# Altium PCB FiberOptic.PcbDoc
Units mm, origin at the board's own origin, x right, y up, seen from the top; angles counter-clockwise.
Board outline 47.62 x 31.75 mm, 2 copper layers (Top Layer, Bottom Layer); 45 components, 24 nets, 155 pads, 31 vias.
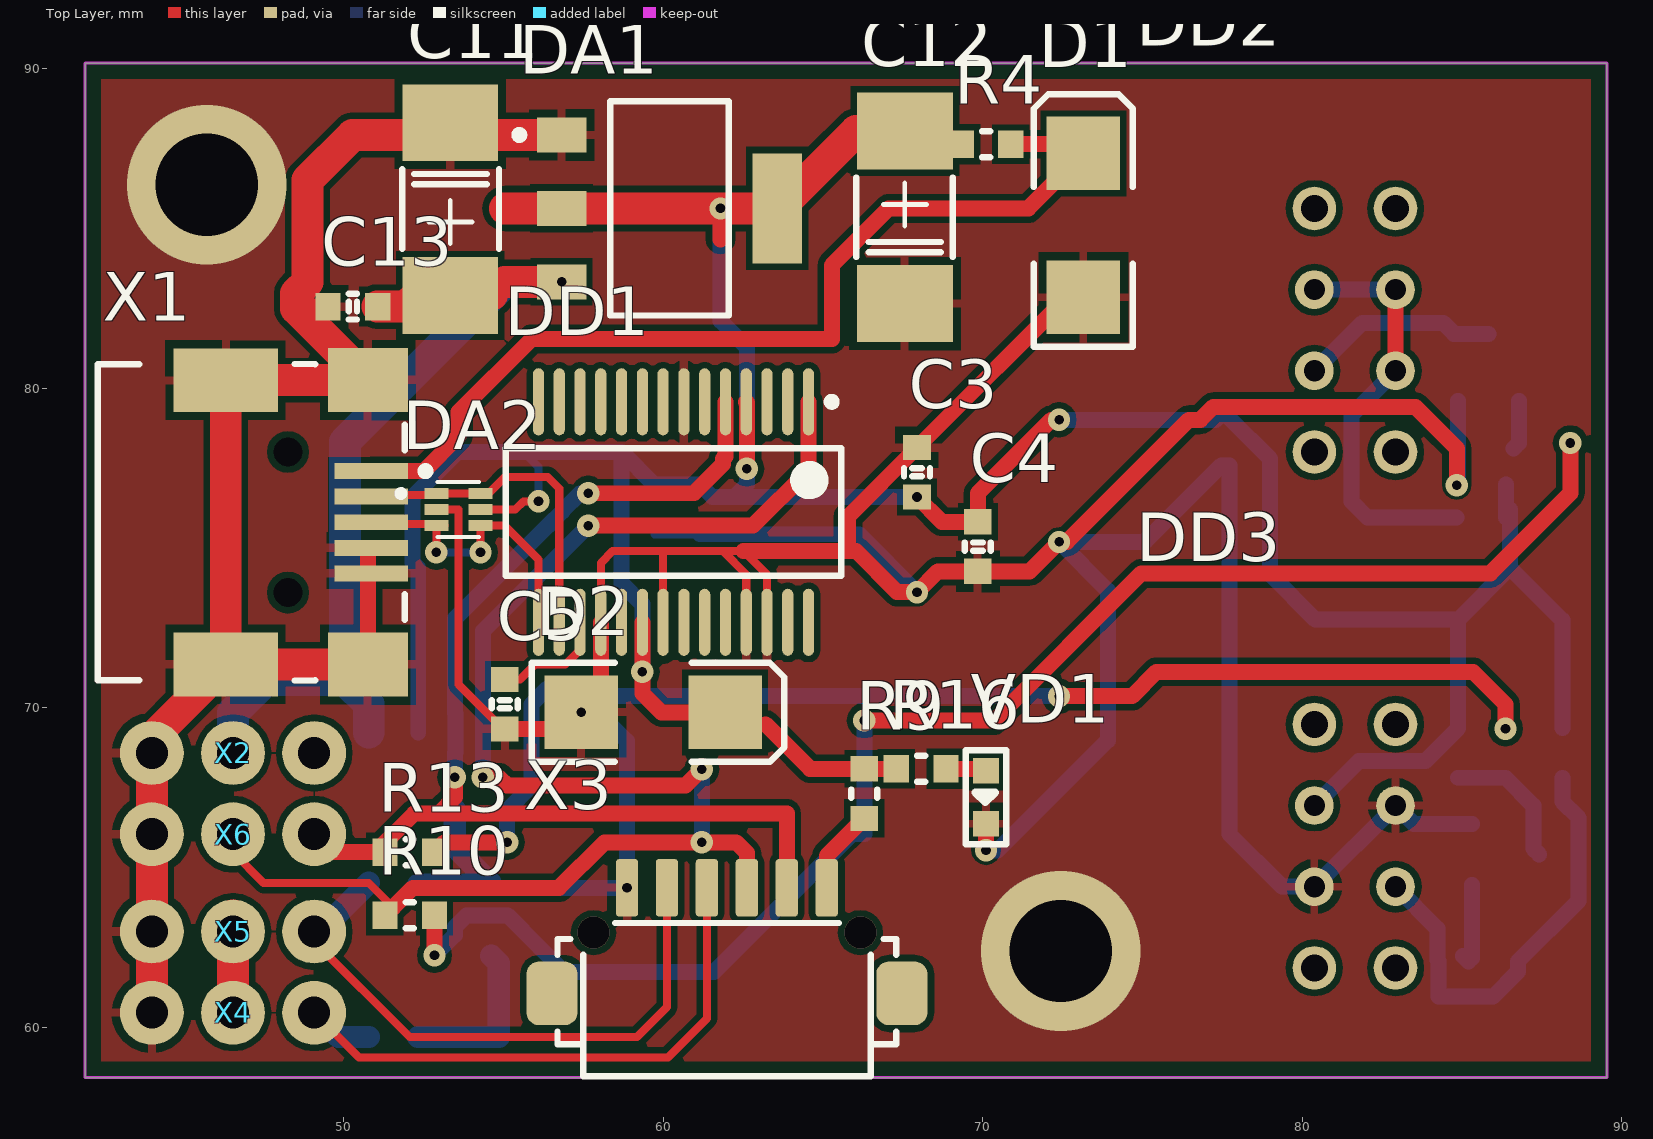
[diagram p0: Top Layer view]
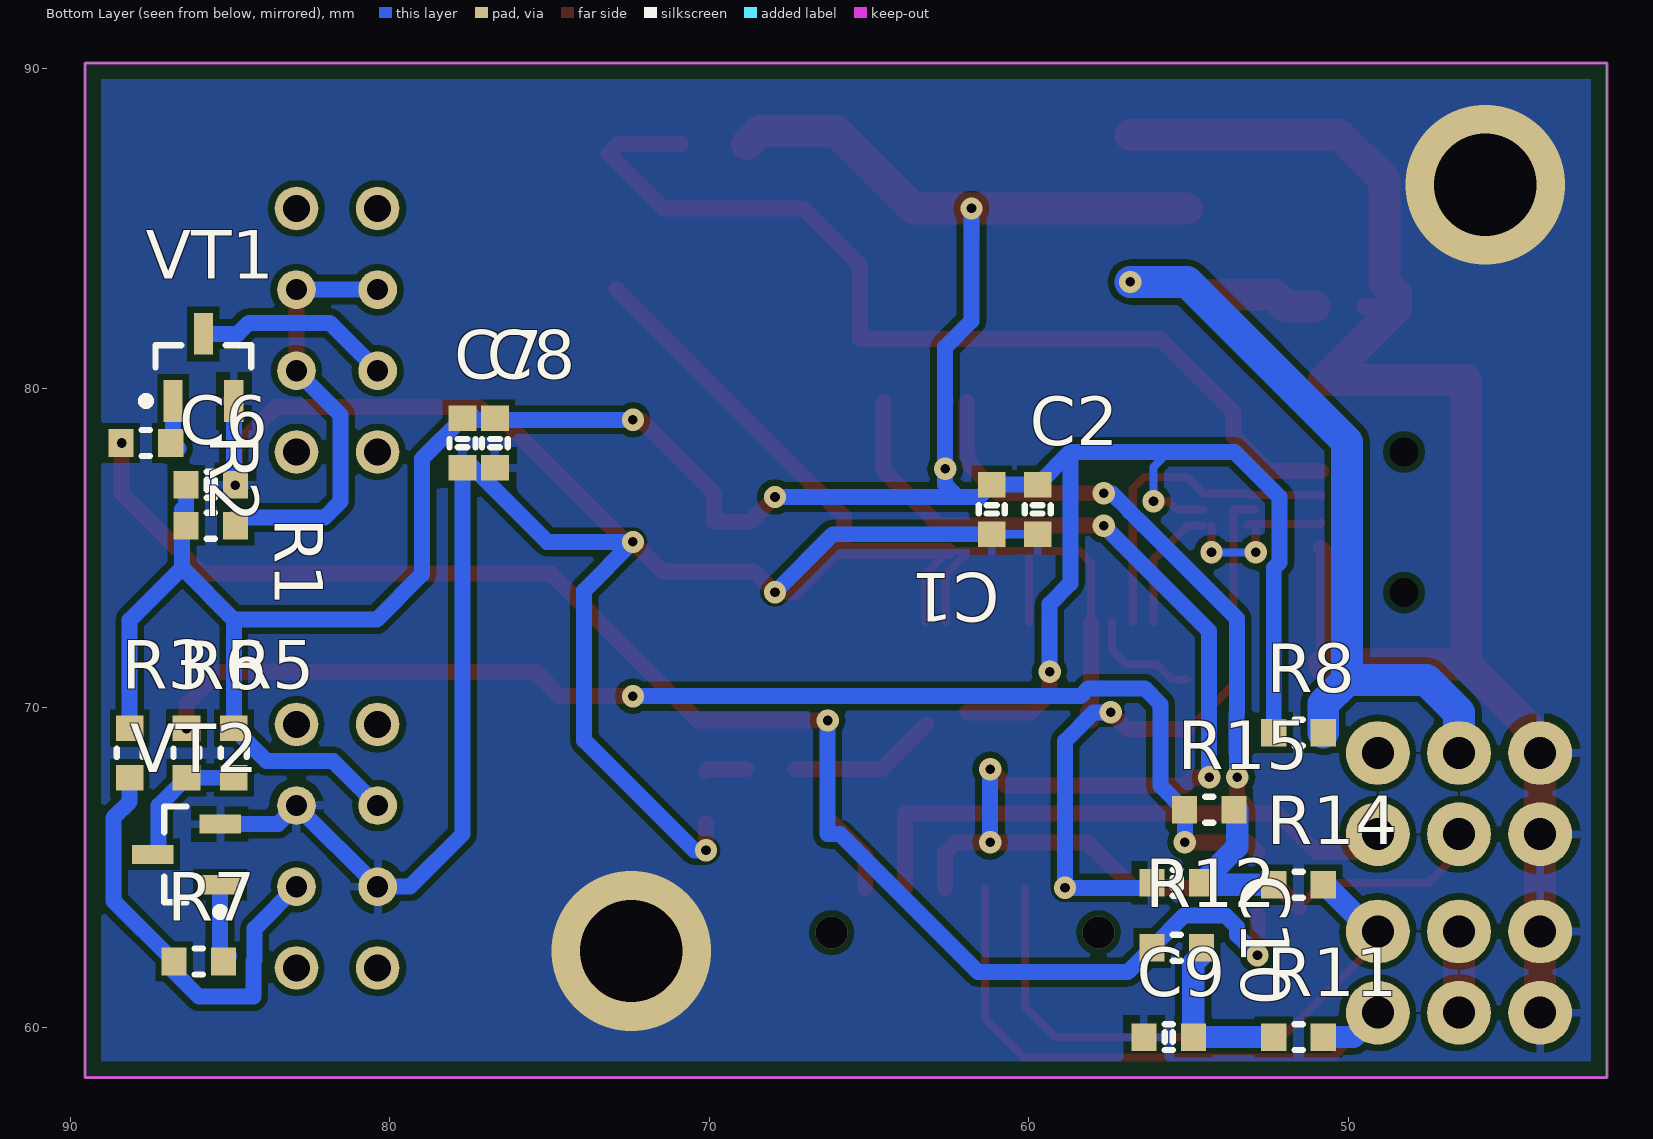
[diagram p1: Bottom Layer view, seen from below]
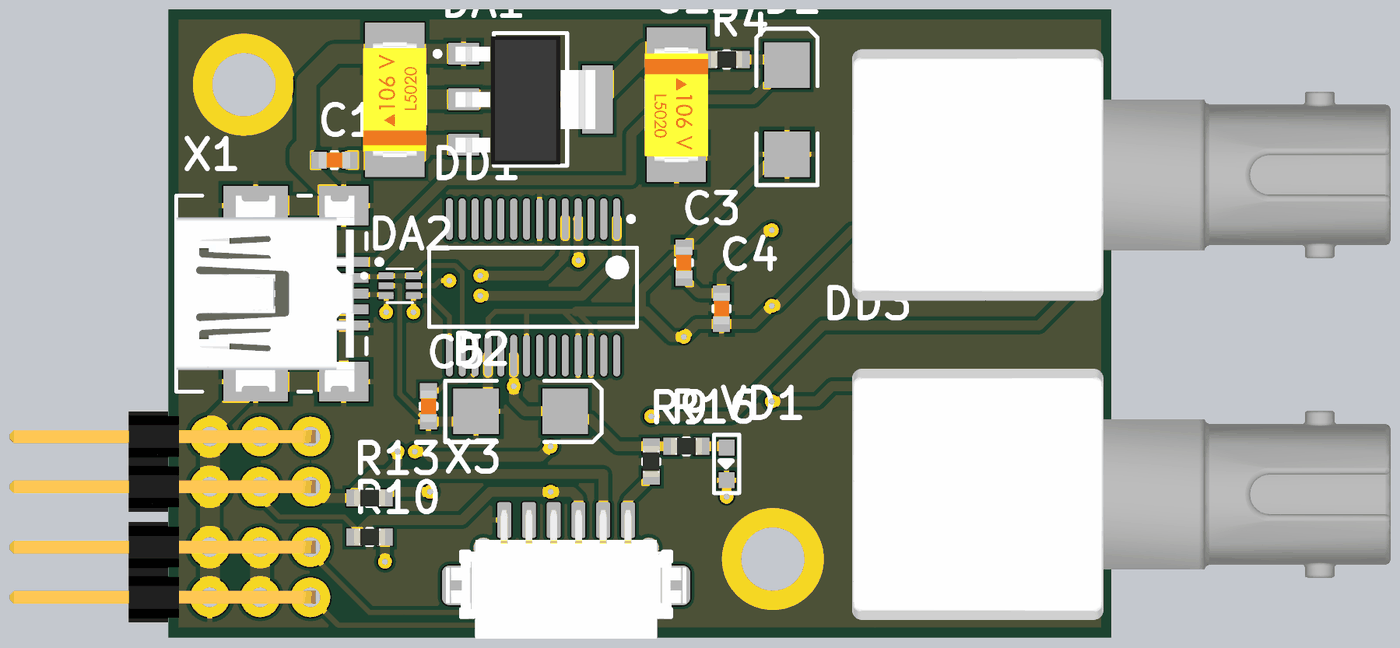
[diagram p2: 3D render of the assembled board from above, using the file's embedded part models]
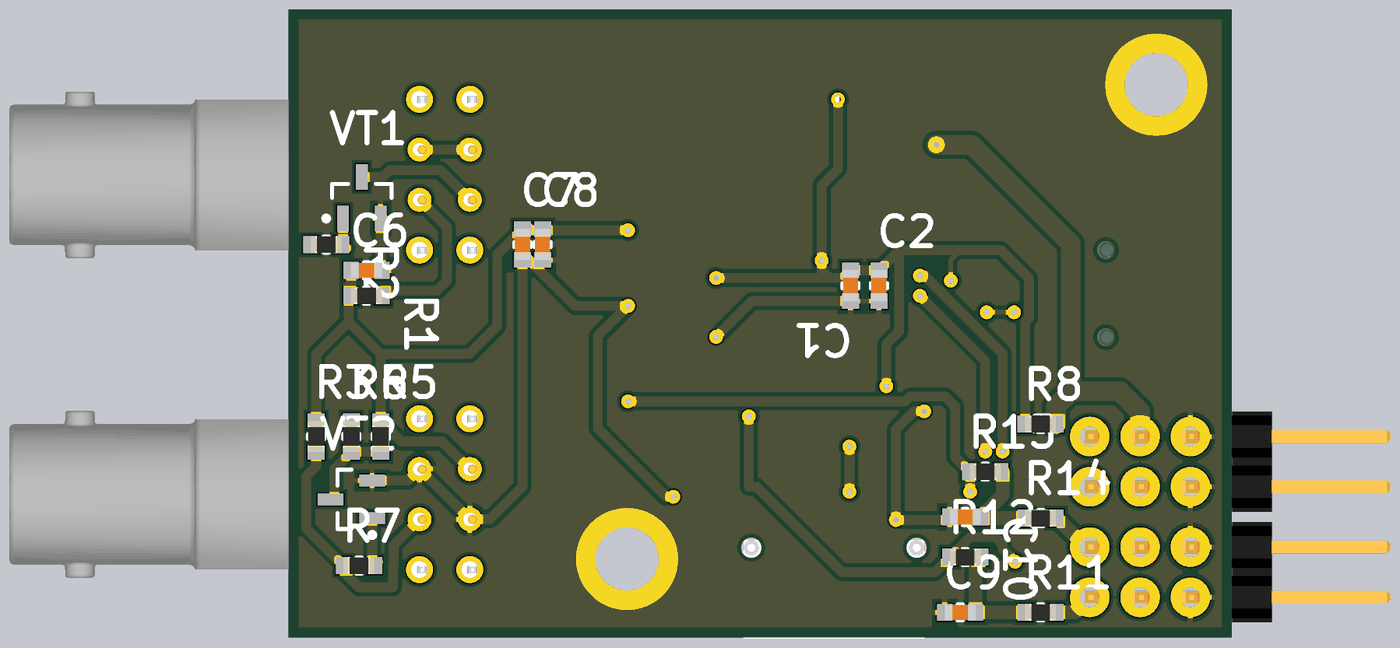
[diagram p3: 3D render of the assembled board from below, using the file's embedded part models]

## Layer stack, top to bottom
Top Solder: solder mask 0.0102, Solder Resist, Dk 3.5
Top Layer: signal copper 0.0356
Dielectric 1: dielectric 0.32, FR-4, Dk 4.8
Bottom Layer: signal copper 0.0356
Bottom Solder: solder mask 0.0102, Solder Resist, Dk 3.5

## Board outline
41.91,58.42 89.535,58.42 89.535,90.17 41.91,90.17

## Design rules (kind name [scope] priority, off if disabled: settings)
BoardOutlineClearance [All] p1: gap=0.5 ignorepadtopadclearanceinfootprint=FALSE except(0: Arc-SplitBarrior Arc-SplitContinuation Track-SplitBarrior Track-SplitContinuation SMDPad-SplitContinuation THPad-SplitContinuation Via-SplitBarrior Via-SplitContinuation Fill-SplitBarrior Fill-SplitContinuation Poly-SplitBarrior Poly-SplitContinuation Region-SplitBarrior Region-SplitContinuation Text-SplitBarrior Text-SplitContinuation)
Clearance [All] p1: gap=0.15 ignorepadtopadclearanceinfootprint=FALSE except(0.2: Arc-Fill Arc-Poly Arc-Region Track-Fill Track-Poly Track-Region SMDPad-Fill SMDPad-Poly SMDPad-Region THPad-Fill THPad-Poly THPad-Region Via-Fill Via-Poly Via-Region Fill-Fill Fill-Poly Fill-Region Poly-Poly Poly-Region Region-Region)
ComponentClearance [All] p1: gap=-0.05 collisioncheckmode=3 verticalgap=0 showdistances=TRUE
DiffPairsRouting [All] p1: maxlimit=0.15 minlimit=0.15 mostfreqgap=0.15 toplayer_minwidth=0.15 toplayer_maxwidth=0.15 toplayer_prefwidth=0.15 bottomlayer_minwidth=0.15 bottomlayer_maxwidth=0.15 bottomlayer_prefwidth=0.15 maxuncoupledlength=5
Height [All] p1: minheight=0 maxheight=50 prefheight=10
HoleSize [All] p1: absolutevalues=TRUE maxlimit=5 minlimit=0.3 maxpercent=80.000 minpercent=20.000
HoleToHoleClearance [All] p1: gap=0.4 allowstackedmicrovias=TRUE
MinimumAnnularRing [All] p1: minimumring=0.2
MinimumSolderMaskSliver [All] p1: minsoldermaskwidth=0.15
PlaneClearance [All] p1: clearance=0.254
PolygonConnect [All] p1: thpad.connectstyle=Relief thpad.reliefconductorwidth=0.254 thpad.reliefentries=4 thpad.polygonreliefangle="90 Angle" thpad.airgapwidth=0.254 smdpad.connectstyle=Relief smdpad.reliefconductorwidth=0.254 smdpad.reliefentries=4 smdpad.polygonreliefangle="90 Angle" smdpad.airgapwidth=0.254 via.connectstyle=Direct via.reliefconductorwidth=0.15 via.reliefentries=4 via.polygonreliefangle="90 Angle" via.airgapwidth=0.2
RoutingVias [All] p1: holewidth=0.3 width=0.7 viastyle="Through Hole" minholewidth=0.3 minwidth=0.7 maxholewidth=2 maxwidth=3
SilkToSilkClearance [All] p1: silktosilkclearance=0.15
SilkToSolderMaskClearance SilkscreenOverComponentPads [IsPad] p1: minsilkscreentomaskgap=0.1 clearancetoexposedcopper=TRUE
SolderMaskExpansion [All] p1: expansion=0.075
Width [All] p1: maxlimit=5 minlimit=0.254 preferedwidth=0.5
21 further rules are at their usual default settings.

## Components (designator, comment, footprint, x,y, rotation, side; value= is the part's Value field where it differs from the comment)
C1 "100n" SMT0603CAP/VISHAY 61.16,76.2 r270 bottom
C2 "100n" SMT0603CAP/VISHAY 59.725,76.2 r270 bottom
C3 "100n" SMT0603CAP/VISHAY 67.945,77.365 r90 top
C4 "100n" SMT0603CAP/VISHAY 69.85,75.04 r270 top
C5 "100n" SMT0603CAP/VISHAY 55.045,70.104 r270 top
C6 "1u" SMT0603CAP/VISHAY 85.598,76.975 r180 bottom
C7 "100n" SMT0603CAP/VISHAY 77.724,78.28 r270 bottom
C8 "100n" SMT0603CAP/VISHAY 76.708,78.28 r270 bottom
C9 "10n" SMT0603CAP/VISHAY 55.626,59.69 r0 bottom
C10 "10n" SMT0603CAP/VISHAY 55.372,64.516 r0 bottom
C11 "100u" VISHAY-TANTALUM-CAP-TYPE-C/VISHAY 53.34,85.598 r90 top
C12 "100u" VISHAY-TANTALUM-CAP-TYPE-C/VISHAY 67.564,85.344 r270 top
C13 "100n" SMT0603CAP/VISHAY 50.292,82.55 r0 top
D1 "5.0v" SMB 73.152,85.09 r90 top
D2 "5.0v" SMB 59.69,69.85 r0 top
DA1 "REG1117-5" ZZ311 60.198,85.62 r270 top
DA2 "USBLC6-2P6" SOT50P160X60-6N 53.594,76.2 r0 top
DD1 "FT232RL-Reel" SSOP-28_N 60.325,76.12 r270 top
DD2 "HFBR-1414Z" HFBR1414Z 90.17,82.185 r0 top
DD3 "HFBR-2412Z" HFBR2412Z 90.17,66.04 r0 top
R1 "100" SMT0603/VISHAY 85.598,75.692 r0 bottom
R2 "100" SMT0603/VISHAY 87.63,78.28 r0 bottom
R3 "560" SMT0603/VISHAY 88.138,68.58 r90 bottom
R4 "1" SMT0603/VISHAY 70.104,87.63 r180 top
R5 "4.7k" SMT0603/VISHAY 84.88,68.58 r270 bottom
R6 "100" SMT0603/VISHAY 86.36,68.58 r270 bottom
R7 "100" SMT0603/VISHAY 85.974,62.055 r0 bottom
R8 "0 or empty" SMT0603/VISHAY 51.562,69.215 r180 bottom
R9 "0 or empty" SMT0603/VISHAY 66.294,67.31 r90 top
R10 "0 or empty" SMT0603/VISHAY 52.07,63.5 r180 top
R11 "330" SMT0603/VISHAY 51.562,59.69 r0 bottom
R12 "0 or empty" SMT0603/VISHAY 55.372,62.484 r0 bottom
R13 "0 or empty" SMT0603/VISHAY 52.07,65.474 r180 top
R14 "330" SMT0603/VISHAY 51.562,64.455 r0 bottom
R15 "0 or empty" SMT0603/VISHAY 54.356,66.802 r0 bottom
R16 "1k" SMT0603/VISHAY 68.072,68.085 r180 top
VD1 "KP-1608SRC-PRV/KINGBRIGHT" 1.6x0.8SMTLED/KINGBRIGHT 70.104,67.196 r270 top
VT1 "IRML6244tr2pbf" SOT23_N 85.83,80.645 r90 bottom
VT2 "IRML6244tr2pbf" SOT23_N 86.36,65.405 r0 bottom
X1 "miniUSB_X" miniUSB_AB 43.01,75.8 r180 top
X2 "PLT-3" PLT-3T 49.08,68.58 r180 top
X3 "DF13" "HIROSE DF13-6P-1.25H" 61.995,60.96 r180 top
X4 "PLT-3" PLT-3T 49.08,60.452 r180 top
X5 "PLT-3" PLT-3T 49.08,62.992 r180 top
X6 "PLT-3" PLT-3T 49.08,66.04 r180 top

## Footprints (in the part's own frame and the unit in brackets; to place one, negate y for a bottom-side part, rotate by r counter-clockwise, add the part's x,y. Pads: shape width x height; smd on the part's side, far side on the other; paste and mask are expansions set on the pad)
1.6x0.8SMTLED/KINGBRIGHT [mm]
  rect 0.8x0.8 smd: 1(-0.825,0) 2(0.825,0)
  silkscreen extent -1.47,-0.64 1.47,0.64, body extent -0.8,-0.4 0.8,0.4, height 0.7
HFBR1414Z [mm]
  round 1.365 / inner round 1.524 / far side round 1.365 hole 0.84: 1(-9.79,3.435) 4(-9.79,-4.185) 5(-7.25,-4.185) 8(-7.25,3.435)
  round 1.21 / inner round 1.524 / far side round 1.21 hole 0.66: 2(-9.79,0.895) 3(-9.79,-1.645) 6(-7.25,-1.645) 7(-7.25,0.895)
  body extent -15.62,-6.73 13.47,7.49, height 10.2
HFBR2412Z [mm]
  round 1.365 / inner round 1.524 / far side round 1.365 hole 0.84: 1(-9.79,3.435) 4(-9.79,-4.185) 5(-7.25,-4.185) 8(-7.25,3.435)
  round 1.21 / inner round 1.524 / far side round 1.21 hole 0.66: 2(-9.79,0.895) 3(-9.79,-1.645) 6(-7.25,-1.645) 7(-7.25,0.895)
  body extent -15.62,-6.73 13.47,5.96, height 10.2
"HIROSE DF13-6P-1.25H" [mm] "DF13 Series 1.25mm pitch miniature crimping connector single row"
  rrect30% 0.7x1.8 smd: 1(-3.125,-3.4) 2(-1.875,-3.4) 3(-0.625,-3.4) 4(0.625,-3.4) 5(1.875,-3.4) 6(3.125,-3.4)
  rrect50% 1.6x2 smd: M(-5.475,-0.1) M(5.475,-0.1)
  silkscreen extent -5.3,-2.3 5.3,2.5, body extent -6.07,-3.9 6.08,2.6, height 3.59
miniUSB_AB [mm] "Connector; USB2.0, Type AB, SM; 5 Position; Right Angle"
  rect 2.3x0.5 smd: 1(-7.85,-1.6) 2(-7.85,-0.8) 3(-7.85,0) 4(-7.85,0.8) 5(-7.85,1.6)
  rect 2.5x2 smd: 6(-7.75,4.45) 8(-7.75,-4.45)
  rect 3.262x2 smd: 7(-3.302,4.445) 9(-3.302,-4.445)
  round 0.6 hole 0.9 unplated: MH1(-5.25,2.2) MH2(-5.25,-2.2)
  silkscreen extent -9.68,-4.95 0.7,4.95, body extent -8.29,-4.95 0.71,4.95, height 4
PLT-3T [mm]
  round 2 hole 1: 1(0,0) 2(2.54,0) 3(5.08,0)
  body extent -0.25,-1.27 15.19,1.27, height 7.62
SMB [mm] "DO-214-AA/SMB; 2 C-Bend Leads; Body 5.3 x 3.6 mm, inc. leads (LxW)"
  rect 2.3x2.3 smd: 1(-2.25,0) 2(2.25,0)
  silkscreen extent -3.8,-1.55 4.1,1.55
SMT0603/VISHAY [mm]
  rect 0.787x0.864 smd: 1(-0.775,0) 2(0.775,0)
  silkscreen extent -0.13,-0.41 0.13,0.41, body extent -0.78,-0.43 0.77,0.43, height 0.45
SMT0603CAP/VISHAY [mm]
  rect 0.787x0.864 smd: 1(-0.775,0) 2(0.775,0)
  silkscreen extent -0.13,-0.41 0.13,0.41, body extent -0.8,-0.4 0.8,0.4, height 0.5
SOT23_N [mm] "SOT23, 3-Leads, Body 2.9x1.3mm, Pitch 0.95mm, Lead Span 2.3mm, IPC Medium Density"
  rect 1.3x0.6 smd: 1(-1.05,0.95) 2(-1.05,-0.95) 3(1.05,0)
  silkscreen extent -1.17,-1.5 0.7,1.93, body extent -0.7,-1.5 0.7,1.5, height 1.1
SOT50P160X60-6N [mm]
  rect 0.75x0.35 smd: 1(-0.69,0.5) 2(-0.69,0) 3(-0.69,-0.5) 4(0.69,-0.5) 5(0.69,0) 6(0.69,0.5)
  silkscreen extent -1.9,-0.85 0.65,0.85
SSOP-28_N [mm] "SOP, 28-Leads, Body 10.2x5.3mm, Pitch 0.65mm, IPC Medium Density"
  oval 2.1x0.35 smd: 1(-3.45,4.225) 2(-3.45,3.575) 3(-3.45,2.925) 4(-3.45,2.275) 5(-3.45,1.625) 6(-3.45,0.975) 7(-3.45,0.325) 8(-3.45,-0.325) 9(-3.45,-0.975) 10(-3.45,-1.625) 11(-3.45,-2.275) 12(-3.45,-2.925) 13(-3.45,-3.575) 14(-3.45,-4.225) 15(3.45,-4.225) 16(3.45,-3.575) 17(3.45,-2.925) 18(3.45,-2.275) 19(3.45,-1.625) 20(3.45,-0.975) 21(3.45,-0.325) 22(3.45,0.325) 23(3.45,0.975) 24(3.45,1.625) 25(3.45,2.275) 26(3.45,2.925) 27(3.45,3.575) 28(3.45,4.225)
  silkscreen extent -3.57,-5.25 2,5.25, body extent -2.8,-5.25 2.8,5.25, height 2
VISHAY-TANTALUM-CAP-TYPE-C/VISHAY [mm]
  rect 2.4x3 smd: 1(-2.7,0) 2(2.7,0)
  silkscreen extent -1.24,-1.52 1.24,1.5, body extent -2.9,-1.6 2.9,1.6, height 2.6
ZZ311 [mm] "SOT-223/SC-73; 4 Leads; Body 6.7 x 7.3 mm, inc. leads (LxW max)"
  rect 1.1x1.55 smd: 1(-2.3,-3.375) 2(0,-3.375) 3(2.3,-3.375)
  rect 3.45x1.55 smd: 4(0,3.375)
  silkscreen extent -3.35,-4.82 3.35,1.85, body extent -3.2,-3.79 3.3,3.28, height 1.6

## Part data
C1 C2 C3 C4 C5 C6 C7 C8 C9 C10 C13: library part CC0603JRNPO9BN181/YAGEO, "180p 50V 0603 cap", PackageReference=0603
C11 C12: library part 293D107X9010C2TE3/VISHAY_1, "100u 10V tantalum cap"
D1 D2: library part Diode, "Default Diode", Code_JEDEC=DO-214-AB, LatestRevisionDate=17-Jul-2002, LatestRevisionNote="Re-released for DXP Platform.", PackageDescription="DO-214-AB/SMC; 2 C-Bend Leads; Body 7.9 x 5.9 mm, inc. leads (LxW)", PackageReference=SMC, PackageVersion=Sep-1996, Published=8-Jun-2000, Publisher="Altium Limited"
DA1: "800mA and 1A Low Dropout Positive Regulator 2.85V, 3.3V, 5V, and Adjustable", ComponentLink1Description="Manufacturer Link", ComponentLink1URL=http://www.ti.com/, ComponentLink2Description=Datasheet, ComponentLink2URL=http://www-s.ti.com/sc/ds/REG1117.pdf, DatasheetVersion=Sep-1997, LatestRevisionDate=17-Jul-2002, LatestRevisionNote="Re-released for DXP Platform.", PackageDescription="SOT-223/SC-73; 4 Leads; Body 6.7 x 7.3 mm, inc. leads (LxW max)", PackageReference=ZZ311, PackageVersion=revC, Published=8-Jun-2000, Publisher="Altium Limited"
DA2: "USBLC6 Series 2 Line 6 V SMT Bi Directional ESD Protection - SOT-666", PACKAGE="SOT-563 STMicroelectronics", Availability=Unavailable, MF=STMicroelectronics, MP=USBLC6-2P6, Price=None, SnapEDA_Link=https://www.snapeda.com/parts/USBLC6-2P6/STMicroelectronics/view-part/?ref=snap
DD1: "USB UART Asynchronous Serial Data Transfer Chip, 28-pin SSOP, Tape and Reel", Manufacturer=FTDI, ComponentLink1Description="Manufacturer URL", ComponentLink1URL=http://www.ftdichip.com/, ComponentLink2Description=Datasheet, ComponentLink2URL=http://www.ftdichip.com/Support/Documents/DataSheets/ICs/DS_FT232R.pdf, DatasheetVersion="ver 2.10, Mar-2012", PackageDescription="28-Pin Small Outline Package 0.65 mm Pitch", PackageReference=SSOP-28, PackageVersion=Mar-12, PartNumber=FT232RL-Reel
DD2: Manufacturer_Name="Avago Technologies", PACKAGE=HFBR2416Z, Arrow_Part_Number=HFBR-1414Z, Arrow_Price-Stock=http://uk.rs-online.com/web/p/products/4965692, DeviceSetName=HFBR-1414Z, GateName_1=G$1, Height=mm, LibraryName=HFBR-1414Z, Manufacturer_Part_Number=HFBR-1414Z, RS_Part_Number=4965692, RS_Price-Stock=http://uk.rs-online.com/web/p/products/4965692, SymbolName_1=HFBR-1414Z
DD3: Manufacturer_Name="Avago Technologies", Manufacturer_Part_Number=HFBR-1414Z, PACKAGE=HFBR2416Z, Arrow_Part_Number=HFBR-1414Z, Arrow_Price-Stock=http://uk.rs-online.com/web/p/products/4965692, DeviceSetName=HFBR-1414Z, GateName_1=G$1, Height=mm, LibraryName=HFBR-1414Z, RS_Part_Number=4965692, RS_Price-Stock=http://uk.rs-online.com/web/p/products/4965692, SymbolName_1=HFBR-1414Z
R1 R2 R3 R5 R6 R7 R10 R13 R14 R15 R16: library part CRCW060310K0FKEA/MURATA, "10k"
  R16: PackageReference=0603
R4: library part CRCW060310K0FKEA/MURATA, "0", PackageReference=0603
R8 R9 R12: library part CRCW060310K0FKEA/MURATA
R11: library part CRCW060310K0FKEA/MURATA, "0 or empty"
VD1: "Red 0603 LED", PackageReference=0603
VT1 VT2: "N-Channel MOSFET", LatestRevisionDate=17-Jul-2002, LatestRevisionNote="Re-released for DXP Platform.", PackageDescription="TO, Flat Index; 3 In-Line, Axial Leads; Body Dia. 4.6mm; Lead Dia. 0.5 mm (max)", PackageReference=E3, PackageVersion=1995/1996, Published=8-Jun-2000, Publisher="Altium Limited"
X1: "USB 2.0, Right Angle, SMT, A Type, Receptacle, 5 Position, Black", PackageDocument=15-Nov-2002, ComponentLink1Description="Manufacturer Link", ComponentLink1URL=http://www.tycoelectronics.com/, ComponentLink2Description="Packaging Specification", ComponentLink2URL=http://ecommas.tycoelectronics.com/commerce/DocumentDelivery/DDEController?Action=showdoc&DocId=Customer+Drawing%7F440478%7FB%7Fpdf%7FEnglish%7FC_440478_B.pdf, ContactMaterial="Phosphor Bronze", ContactPlating="Gold (30) over Nickel", DatasheetDocument=15-Nov-2002, DrillSize="Corresponds to nominal value.", HousingMaterial=Thermoplastic, PackageReference=440478, PanelGround=Without, PCB_Layout="Complies with manufacturer's recommendation.", Published=15-Jul-2004, Publisher="Altium Limited"
X3: library part DF13-6P

## Via types
v1: diameter 0.7, hole 0.3, Top Layer to Bottom Layer, 27 vias
v2: diameter 5, hole 3.2, Top Layer to Bottom Layer, 2 vias
v3: diameter 1, hole 1, Top Layer to Bottom Layer, tented both sides, 2 vias

## Nets (pads, with @x,y where several pads share a name; then routed paths per layer and width w, separated by ;. In a path a pad name is that pad's centre, name@x,y a point inside that pad or via, vN(x,y) a via of type N, cw(c..) or ccw(c..) an arc to the next point about the centre after c; other vN are vias at no path point)
5V: C1.1 C2.1 C3.1 C4.1 C6.1 C7.1 C8.1 C12.1 D2.2 DA1.2 DA1.4 DA2.5 DD1.4 DD1.20 DD3.2 R1.2 R3.2 R4.2 R5.1 R8.1 R9.2 R16.2 | length 116.6
  Top Layer w0.254: DA2.5@54.538,76.2 55.372,76.2 55.626,76.454 v1(56.1,76.454)
  Top Layer w0.5: DD1.20 v1(59.35,71.12) 59.35,70.444 59.944,69.85 D2.2 ; DD1.4 62.62,79.55 v1(62.62,77.47) ; 63.21,69.475 64.6,68.085 R9.2 R16.2 ; v1(67.945,76.59) 68.72,75.815 C4.1 69.85,76.708 72.148,79.006 v1(72.39,79.006) ; 61.795,84.645 v1(61.795,85.62) 61.795,84.645
  Top Layer w1: 55.045,85.62 DA1.2 v1(61.795,85.62) DA1.4 63.616,85.62 66.04,88.044 C12.1 68.407,88.044 C12.1@68.821,87.63
  Bottom Layer w0.254: 55.626,78 56.1,77.526 v1(56.1,76.454)
  Bottom Layer w0.5: R8.1 52.337,74.364 52.154,74.547 52.154,76.586 53.568,78 55.626,78 58.7,78 ; v1(59.35,71.12) 59.35,73.238 58.7,73.888 58.7,78 ; v1(61.795,85.62) 61.795,82.105 62.62,81.28 v1(62.62,77.47) 62.62,76.98 62.23,76.59 ; v1(67.945,76.59) 62.23,76.59 ; v1(72.39,79.006) 77.274,79.006 77.286,78.994 77.446,79.154 C7.1@77.47,79.13 ; C7.1 78.994,77.785 78.994,74.168 80.408,72.754 84.88,72.754 ; DD3.2 81.771,68.326 83.851,68.326 R5.1 84.88,72.754 ; R1.2@86.373,75.946 C6.1 ; 86.5,76.2 86.5,74.374 ; R3.2 88.138,72.736 86.5,74.374 ; 58.7,78 C2.1 C1.1 61.545,76.59 62.23,76.59 ; 84.88,72.754 86.5,74.374
GND: C1.2 C2.2 C3.2 C4.2 C5.2 C6.2 C7.2 C8.2 C9.2 C10.2 C11.2 C12.2 C13.1 D1.1 D2.1 DA1.1 DA2.2 DD1.7 DD1.18 DD1.21 DD1.25 DD1.26 DD3.3 DD3.7 VD1.2 VT1.2 VT2.2 X1.4 X1.5 X1.6 X1.7 X1.8 X1.9 X2.3 X3.6 X4.3 X5.3 X6.3 | length 177
  Top Layer w0.254: DA2.2 53.594,76.2 53.594,70.726 54.991,69.329 C5.2 ; DD1.18 58.05,74.53 58.42,74.9 60,74.9 ; DD1.21 60,74.9 ; DD1.25 62.6,74.168 61.868,74.9 ; DD1.26 63.25,74.164 62.514,74.9 61.868,74.9 ; 60,74.9 61.868,74.9
  Top Layer w0.5: 48.514,82.956 48.92,82.55 C13.1 ; X1.6 50.76,74.9 X1.4 ; C5.2 56.919,69.329 v1(57.44,69.85) D2.1@58.05,69.85 ; D2.1@58.05,69.596 D2.1@58.05,69.85 ; DD1.18 D2.1@58.05,69.85 ; D2.1@58.166,69.85 D2.1@58.05,69.85 ; 62.514,74.9 65.786,74.9 ; v1(70.104,65.532) VD1.2 ; D1.1@72.898,83.094 C3.2 65.786,75.981 65.786,74.9 ; v1(84.836,76.962) 84.836,78.114 83.539,79.411 77.216,79.411 76.811,79.006 76.454,79.006 72.632,75.184 v1(72.39,75.184) 71.471,74.265 C4.2 68.595,74.265 v1(67.945,73.615) 67.325,73.615 66.04,74.9 65.786,74.9
  Top Layer w1: X4.3@43.96,60.96 44,61 X5.3 X6.3 X2.3 44,69.043 X1.7 ; X1.6 50.755,71.355 X1.7 ; DA1.1 50.283,87.92 48.87,86.507 48.87,83.312 48.514,82.956 48.514,82.496 X1.8 50.755,80.245 X1.9 X1.7
  Bottom Layer w0.254: C2.2 C1.2
  Bottom Layer w0.5: 56.607,64.36 v1(58.87,64.36) 58.87,68.95 57.97,69.85 v1(57.44,69.85) ; C1.2 66.135,75.425 v1(67.945,73.615) ; v1(70.104,65.532) 70.468,65.532 73.914,68.978 73.914,73.66 v1(72.39,75.184) 75.074,75.184 77.47,77.58 77.724,77.58 C7.2 77.724,66.04 79.369,64.395 DD3.3 DD3.7 83.5,66.355 VT2.2 ; C6.2 v1(84.836,76.962) ; C6.2@84.88,76.975 VT1.2
  other v2: 72.442,62.387 45.72,86.36
NetC5_1: C5.1 DD1.17 | length 3.6
  Top Layer w0.254: C5.1 55.522,70.879 55.986,71.343 56.937,71.343 57.4,71.806 DD1.17
NetC9_1: C9.1 R11.2 R12.1 | length 5.2
  Bottom Layer w0.7: R11.2 C9.1 54.851,62.002 R12.1@54.616,62.236
NetC10_1: C10.1 R14.2 R15.1 | length 5
  Bottom Layer w0.7: R14.2 54.536,64.455 C10.1 53.48,65.633 R15.1@53.48,66.802
NetC11_1: C11.1 C13.2 DA1.3 R8.2 X2.2 | length 29
  Top Layer w1: C13.2 51.954,82.55 52.324,82.92 C11.1@54.645,82.92 ; 55.045,83.32 v1(56.823,83.32)
  Bottom Layer w1: X2.2 46.54,69.85 47.556,70.866 50.038,70.866 ; R8.2 50.787,70.117 50.038,70.866 ; v1(56.823,83.32) 55.045,83.32 50.038,78.313 50.038,70.866
NetD1_2: D1.2 R4.1 X1.1 | length 30.6
  Top Layer w0.5: X1.1 52.508,77.4 53.594,78.486 53.594,79.248 55.88,81.534 65.278,81.534 65.278,83.842 67.056,85.62 71.432,85.62 D1.2 72.862,87.63 R4.1
NetDD2_2: DD2.2 DD2.6 DD2.7 R1.1 | length 13.2
  Top Layer w0.5: DD2.6 DD2.7
  Bottom Layer w0.5: DD2.2 DD2.7 ; DD2.6 81.534,79.154 81.534,76.454 82.042,75.946 R1.1@84.823,75.946
NetDD2_3: DD2.3 VT1.3 | length 6.2
  Bottom Layer w0.5: DD2.3 81.882,82.042 84.409,82.042 84.756,81.695 VT1.3
NetDD3_6: DD3.6 R3.1 R7.2 | length 13.9
  Bottom Layer w0.5: DD3.6 84.23,63.085 84.23,62.105 84.261,62.073 84.261,60.96 85.974,60.96 86.749,61.735 R7.2 88.646,63.952 88.646,66.548 88.138,67.056 R3.1
NetR2_1: R2.1 VT1.1 | length 1.6
  Bottom Layer w0.5: R2.1@86.605,78.105 86.78,78.28 VT1.1
NetR2_2: R2.2 R10.1 R12.2 | length 48.1
  Top Layer w0.5: v1(52.845,62.249) R10.1 ; v1(66.294,69.596) 70.358,69.596 74.962,74.2 85.884,74.2 88.392,76.708 v1(88.392,78.28)
  Bottom Layer w0.5: v1(52.845,62.249) 53.48,62.884 53.48,63.132 53.848,63.5 55.131,63.5 R12.2 56.909,61.722 61.589,61.722 65.907,66.04 66.294,66.04 v1(66.294,69.596) ; v1(88.392,78.28) R2.2
NetR5_2: R5.2 R6.2 VT2.3 | length 4.3
  Bottom Layer w0.5: R5.2 R6.2 87.23,66.935 87.23,65.585 VT2.3
NetR6_1: R6.1 R13.1 R15.2 | length 39.3
  Top Layer w0.5: R13.1 53.157,65.786 v1(55.118,65.786) ; v1(72.39,70.358) 74.676,70.358 75.438,71.12 85.344,71.12 86.36,70.104 v1(86.36,69.342)
  Bottom Layer w0.5: v1(55.118,65.786) 55.118,66.789 R15.2 55.88,67.551 55.88,70.104 56.376,70.6 58.139,70.6 58.381,70.358 v1(72.39,70.358)
NetR7_1: R7.1 VT2.1 | length 2.7
  Bottom Layer w0.5: R7.1@85.024,62.23 R7.1 85.31,62.166 VT2.1
NetR9_1: R9.1 X3.1 | length 2.7
  Top Layer w0.5: X3.1 65.12,65.361 R9.1
NetR16_1: R16.1 VD1.1 | length 1.3
  Top Layer w0.5: R16.1 70.04,68.085 VD1.1
NetX4_2: X4.2 X5.2 | length 2.6
  Top Layer w1: X4.2@46.5,60.96 46.54,61 X5.2@46.54,63.5
PIN: R11.1 X3.4 X4.1 | length 19.5
  Top Layer w0.254: X4.1 50.485,59.047 60.149,59.047 61.37,60.268 X3.4
  Bottom Layer w0.7: X4.1 49.842,59.69 R11.1
POUT: R14.1 X3.5 X5.1 | length 19
  Top Layer w0.254: X5.1 49.08,62.68 52.07,59.69 59.182,59.69 60.12,60.628 X3.5
  Bottom Layer w0.7: X5.1 49.263,62.992 R14.1@50.787,64.516
RX: DD1.1 R10.2 X3.3 X6.2 | length 47.9
  Top Layer w0.254: X6.2 46.54,65.474 47.498,64.516 50.787,64.516 R10.2@51.556,63.748
  Top Layer w0.5: R10.2@51.556,63.748 52.168,64.36 56.74,64.36 58.166,65.786 v1(61.214,65.786) 62.288,65.786 62.62,65.454 X3.3 ; v1(54.356,67.818) 54.864,67.818 55.118,67.564 60.706,67.564 v1(61.214,68.072) ; v1(57.658,75.692) 62.808,75.692 64.55,77.434 DD1.1
  Bottom Layer w0.5: v1(54.356,67.818) 54.356,72.39 v1(57.658,75.692) ; v1(61.214,65.786) v1(61.214,68.072)
TX: DD1.5 R13.2 X3.2 X6.1 | length 36.6
  Top Layer w0.5: X6.1 49.646,65.474 50.996,65.474 52.208,66.686 52.97,66.686 ; v1(53.48,67.818) 53.48,67.196 52.97,66.686 ; v1(57.658,76.708) 60.96,76.708 61.87,77.618 61.87,77.781 61.95,77.861 DD1.5 ; X3.2 63.87,66.686 52.97,66.686
  Bottom Layer w0.5: v1(53.48,67.818) 53.48,68.58 53.498,68.599 53.498,69.813 53.48,69.831 53.48,72.784 56.4,75.704 56.411,75.704 56.85,76.143 56.85,76.154 57.404,76.708 v1(57.658,76.708)
UD+: DA2.3 DA2.4 DD1.15 X1.3 | length 9.4
  Top Layer w0.254: X1.3 50.86,75.748 53.11,75.748 DA2.3@53.158,75.7 ; v1(52.904,74.858) DA2.3 ; v1(54.284,74.858) DA2.4 ; DA2.4@54.538,75.7 55.037,75.7 56.1,74.637 DD1.15
  Bottom Layer w0.254: v1(52.904,74.858) v1(54.284,74.858)
UD-: DA2.1 DA2.6 DD1.16 X1.2 | length 10.5
  Top Layer w0.254: X1.2 50.86,76.652 53.11,76.652 53.158,76.7 54.538,76.7 55.054,77.216 56.388,77.216 56.75,76.854 DD1.16
pads on no net: DD1.2 DD1.3 DD1.6 DD1.8 DD1.9 DD1.10 DD1.11 DD1.12 DD1.13 DD1.14 DD1.19 DD1.22 DD1.23 DD1.24 DD1.27 DD1.28 DD2.1 DD2.4 DD2.5 DD2.8 DD3.1 DD3.4 DD3.5 DD3.8 X1.MH1 X1.MH2 X2.1 X3.M
copper on no net:
  other v3: 57.82,62.96 66.17,62.96

## Polygon pours and split planes (outlines as drawn)
GND on Top Layer "GND_L01_P004" (solid, pour order 4): 41.91,90.17 89.662,90.17 89.662,58.42 41.91,58.42
GND on Bottom Layer "GND_L02_P000" (solid, pour order 0): 41.91,90.17 89.662,90.17 89.662,58.42 41.91,58.42

## Keep-outs
Keep-Out Layer:
  the board outline again, w0.1

## Silkscreen, mask and mechanical layers (free items; w line width, h text height)
Drill Guide:
  lines w0.254: 41.91,58.42 41.91,90.17 89.662,90.17 89.662,58.42 41.91,58.42
Mechanical 16:
  lines w0.254: 41.91,58.42 41.91,90.17 89.408,90.17 89.408,58.42 41.91,58.42
Drill Drawing:
  lines w0.254: 41.91,58.42 41.91,90.17 89.662,90.17 89.662,58.42 41.91,58.42

## Text inside footprints (layer, text, board x,y; h text height)
DD2: Top Overlay "HFBR1414" at 90.678,86.376 h1.52
DD3: Top Overlay "HFBR2412" at 90.678,70.231 h1.52
X1: Mechanical 1 "PCB Edge" at 42.578,79.837 h0.25 r270